# Altium PCB PCB1.PcbDoc
Units mil, origin at the board's own origin, x right, y up, seen from the top; angles counter-clockwise.
Board outline 6000 x 4000 mil, 2 copper layers (Top Layer, Bottom Layer); 47 components, 45 nets, 185 pads, 35 vias.
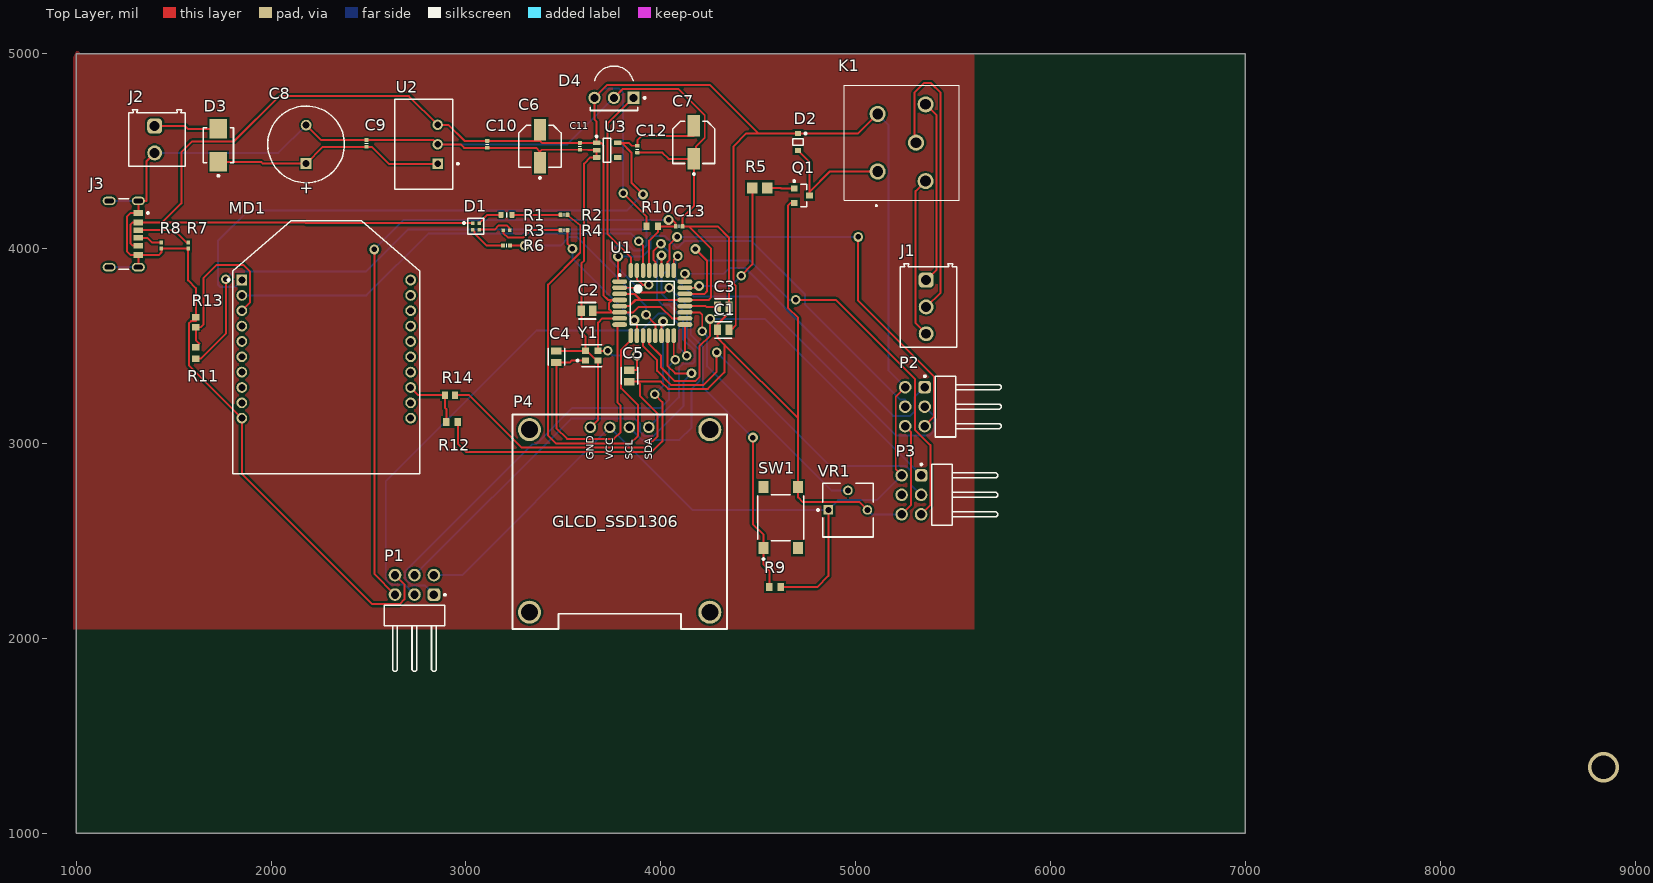
[diagram p0: Top Layer view]
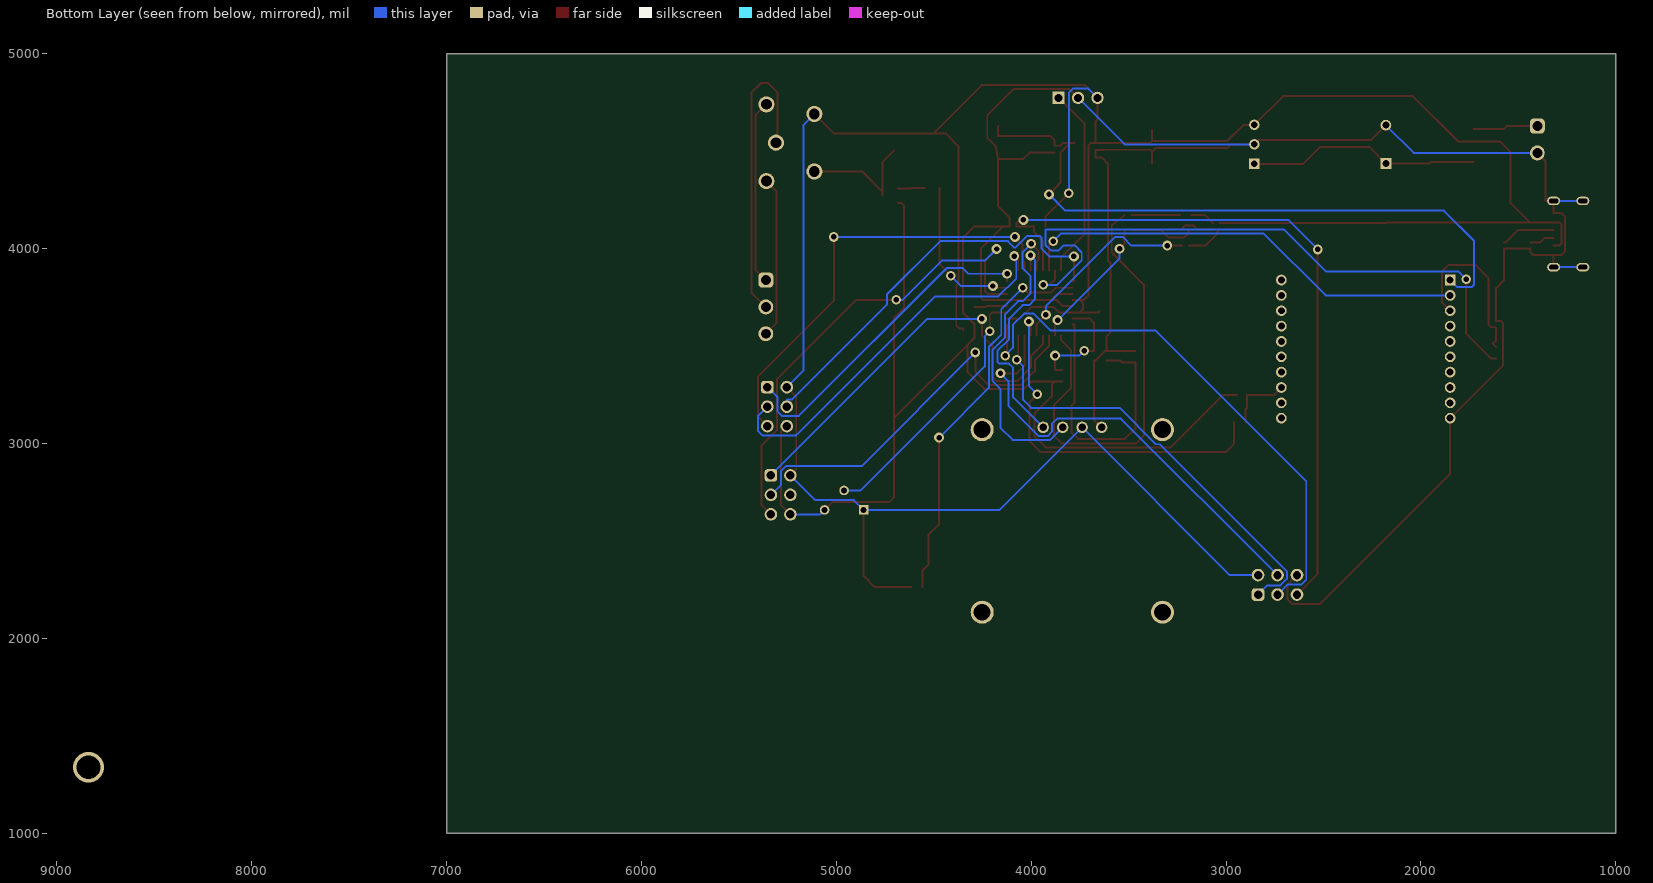
[diagram p1: Bottom Layer view, seen from below]
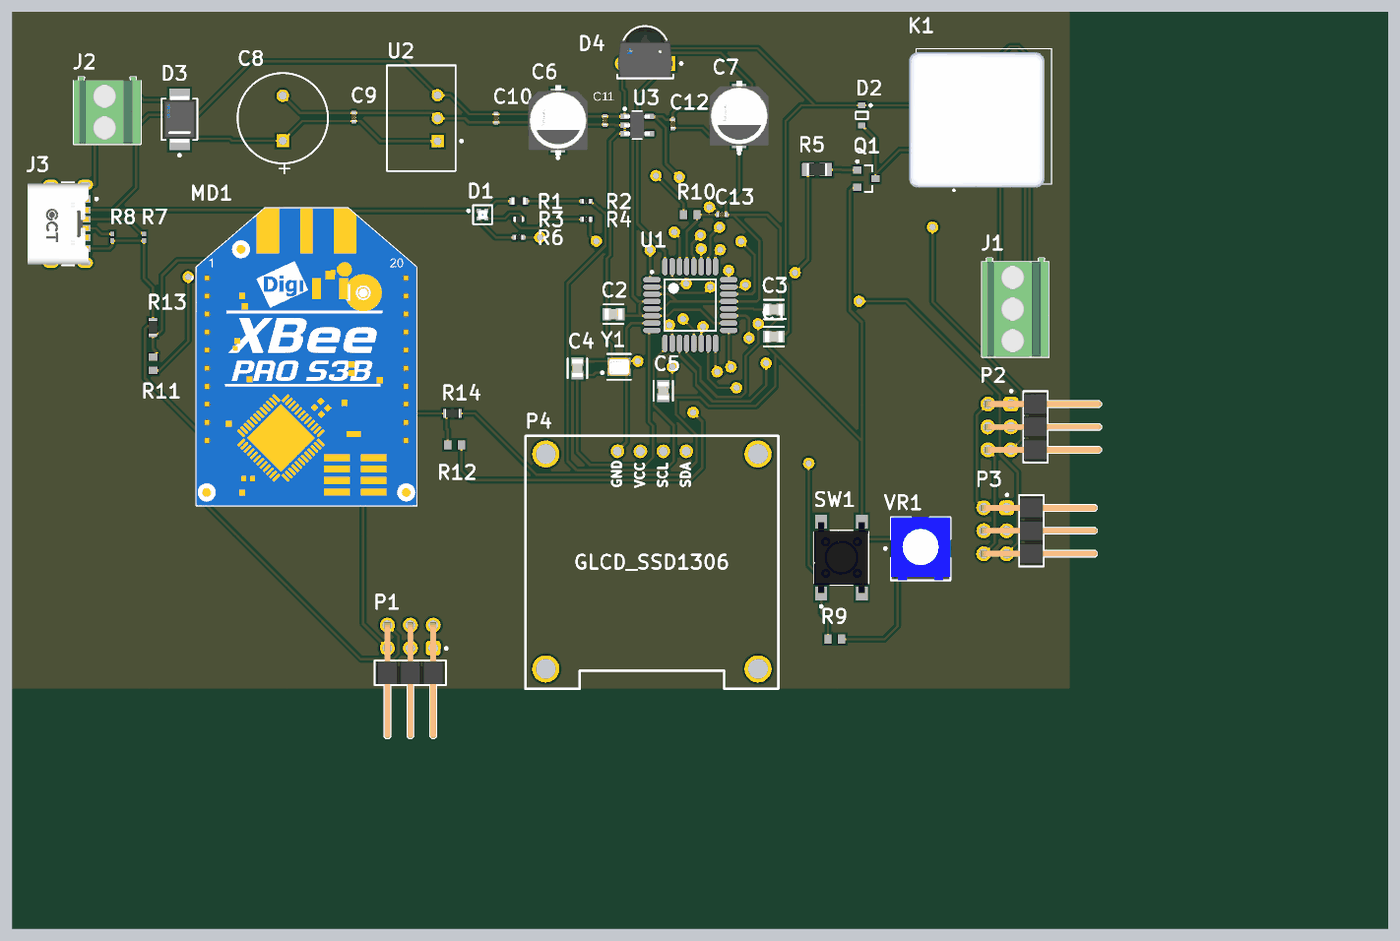
[diagram p2: 3D render of the assembled board from above, using the file's embedded part models]

## Layer stack, top to bottom
Top Solder: solder mask 0.4, Solder Resist, Dk 3.5
Top Layer: signal copper 1.4
Dielectric 1: dielectric 12.6, FR-4, Dk 4.8
Bottom Layer: signal copper 1.4
Bottom Solder: solder mask 0.4, Solder Resist, Dk 3.5

## Board outline
1000,1000 7000,1000 7000,5000 1000,5000

## Design rules (kind name [scope] priority, off if disabled: settings)
Clearance [All] p1: gap=10 ignorepadtopadclearanceinfootprint=FALSE
PolygonConnect [All] p1: connectstyle=Relief reliefconductorwidth=10 reliefentries=4 polygonreliefangle="90 Angle" airgapwidth=10
RoutingVias [All] p1: holewidth=28 width=50 viastyle="Through Hole" minholewidth=28 minwidth=50 maxholewidth=28 maxwidth=50
SolderMaskExpansion [All] p1: expansion=4 istentingtop=FALSE
SupplyNets "Schematic Supply Nets_3" [InNet('+24')] p1: voltage=0.000
SupplyNets "Schematic Supply Nets_2" [InNet('+3.3')] p2: voltage=0.000
SupplyNets "Schematic Supply Nets_1" [InNet('GND')] p3: voltage=0.000
SupplyNets "Schematic Supply Nets" [InNet('+5')] p4: voltage=0.000
Width [All] p1: maxlimit=10 minlimit=10 preferedwidth=10
30 further rules are at their usual default settings.

## Components (designator, comment, footprint, x,y, rotation, side; value= is the part's Value field where it differs from the comment)
C1 "100nF" FP-C0805C-DN-MFG 4320.87,3582.68 r180 top value="0.10 μF"
C2 "100nF" FP-C0805C-DN-MFG 3622.05,3681.1 r180 top value="0.10 μF"
C3 "100nF" FP-C0805C-DN-MFG 4320.87,3700.79 r0 top value="0.10 μF"
C4 "22pF" FP-C0805C-DN-MFG 3464.57,3444.88 r90 top value="22 pF"
C5 "22pF" FP-C0805C-DN-MFG 3838.58,3346.46 r270 top value="22 pF"
C6 "EEEFK1C470UR" FP-FKC-MFG 3380,4525 r90 top
C7 "EEEFK1C470UR" FP-FKC-MFG 4170,4545 r90 top
C8 "ECA-1HM221" CAPPR65-500-1250X1000X1350 2180,4535 r90 top value=220µF
C9 "Capacitor 100nF +/-20% 10V 0402" CAPC0402(1005)60_L 2490,4540 r270 top value=100nF
C10 "Capacitor 100nF +/-20% 10V 0402" CAPC0402(1005)60_L 3110,4535 r90 top value=100nF
C11 "Capacitor 100nF +/-20% 10V 0402" CAPC0402(1005)60_L 3585,4525 r90 top value=100nF
C12 "Capacitor 100nF +/-20% 10V 0402" CAPC0402(1005)60_L 3880,4510 r90 top value=100nF
C13 "Capacitor 100nF +/-20% 10V 0402" CAPC0402(1005)60_L 4094.49,4114.17 r180 top value=100nF
D1 "SML-LX0404SIUPGUSB" FP-SML-LX0404SIUPGUSB-MFG 3051.18,4114.17 r0 top
D2 "BAT54HT1G" ONSC-SOD-323-2-477-02_V 4704.72,4547.24 r270 top
D3 "B260-13-F" FP-SMB-MFG 1730,4530 r90 top value=200pF
D4 "TSOP34138" FP-6_550-5169_01-4-MFG 3759.84,4822.83 r90 top
J1 "691214110003" 691214110003 5374.02,3700.79 r270 top
J2 "691214110002" 691214110002 1415,4560 r270 top
J3 "USB4125-GF-A-0190" FP-USB4125-GF-A-0190-MFG 1200.79,4074.8 r270 top
K1 "PB114012" PB134005 5236.22,4527.56 r0 top
MD1 "XBP9B-DMUTB002" FP-XBP9B-DMUTB002-MFG 2283.46,3494.09 r0 top
P1 "61300621021" 61300621021 2736.22,2116.93 r0 top
P2 "61300621021" 61300621021 5461.81,3188.98 r90 top
P3 "61300621021" 61300621021 5443.7,2736.22 r90 top
P4 "Misc_25" GLCD_SSD1306 3789.37,2598.43 r0 top
Q1 "BC846BLT1G" ONSC-SOT-23-3-318-08_V 4724.41,4271.65 r0 top
R1 "Resistor 120R +/-5 % 0603 0.1 W" RESC0603(1608)_L 3208.66,4173.23 r0 top value=120
R2 "Resistor 10R  +/-1 % 0402 63 mW" RESC0402(1005)_L 3503.94,4173.23 r0 top value=10
R3 "ERJ-2GEJ221X" RESC1005X40X25LL05T05 3208.66,4094.49 r180 top
R4 "Resistor 10R  +/-1 % 0402 63 mW" RESC0402(1005)_L 3503.94,4094.49 r0 top value=10
R5 "Resistor 4k7 +/-1% 0805 125 mW" RESC2013X70X40ML20T20 4508.86,4311.02 r0 top value=4.7k
R6 "Resistor 100R +/-1 % 0402 63 mW" RESC0402(1005)_L 3208.66,4015.75 r0 top value=100
R7 "RC0402FR-075K11L" RESC1005X40X25LL05T10 1574.8,4015.75 r270 top
R8 "RC0402FR-075K11L" RESC1005X40X25LL05T10 1437.01,4015.75 r270 top
R9 "RC0603JR-074K7L" RESC1608X55X25ML10T15 4586.61,2263.78 r0 top
R10 "RC0603JR-074K7L" RESC1608X55X25ML10T15 3956.69,4114.17 r180 top
R11 "RC0603JR-074K7L" RESC1608X55X25ML10T15 1614.17,3464.57 r270 top
R12 "RC0603JR-074K7L" RESC1608X55X25ML10T15 2929.13,3110.24 r0 top
R13 "CRCW060310K0FKEA" RESC1609X50X30NL8T20 1614.17,3622.05 r270 top
R14 "CRCW060310K0FKEA" RESC1609X50X30NL8T20 2919.29,3248.03 r180 top
SW1 "PTS645SM43SMTR92LFS" FP-PTS645SM43SMTR92LFS-MFG 4616.14,2619.09 r90 top
U1 "ATmega328P-AU" 32A_M 3956.69,3720.47 r0 top
U2 "TSR 1-2450" TRACO-SIP-3_V 2855,4535 r90 top
U3 "TPS76333DBVR" DBV0005A_N 3725,4505 r0 top
VR1 "3362P-1-103LF" BOUR-3362P 4960.63,2657.48 r0 top
Y1 "ABM10-16.000MHZ-E20-T" FP-ABM10-MFG 3646.02,3450.94 r0 top

## Footprints (in the part's own frame and the unit in brackets; to place one, negate y for a bottom-side part, rotate by r counter-clockwise, add the part's x,y. Pads: shape width x height; smd on the part's side, far side on the other; paste and mask are expansions set on the pad)
32A_M [mm] "Thin QFP, 32-Leads, Body 7x7mm, Pitch 0.8mm, IPC Low Density"
  oval 1.95x0.6 smd: 1(-4.25,2.8) 2(-4.25,2) 3(-4.25,1.2) 4(-4.25,0.4) 5(-4.25,-0.4) 6(-4.25,-1.2) 7(-4.25,-2) 8(-4.25,-2.8) 17(4.25,-2.8) 18(4.25,-2) 19(4.25,-1.2) 20(4.25,-0.4) 21(4.25,0.4) 22(4.25,1.2) 23(4.25,2) 24(4.25,2.8)
  oval 0.6x1.95 smd: 9(-2.8,-4.25) 10(-2,-4.25) 11(-1.2,-4.25) 12(-0.4,-4.25) 13(0.4,-4.25) 14(1.2,-4.25) 15(2,-4.25) 16(2.8,-4.25) 25(2.8,4.25) 26(2,4.25) 27(1.2,4.25) 28(0.4,4.25) 29(-0.4,4.25) 30(-1.2,4.25) 31(-2,4.25) 32(-2.8,4.25)
  silkscreen extent -4.37,-2.85 2.85,3.77, body extent -3.5,-3.5 3.5,3.5, height 1.2
61300621021 [mm] "Pin Header, pitch 2.54 mm, THT, Angled, dual row, 6p"
  rrect50% 1.65x1.65 hole 1.1: 1(2.54,2.73)
  round 1.65 hole 1.1: 2(2.54,5.27) 3(0,2.73) 4(0,5.27) 5(-2.54,2.73) 6(-2.54,5.27)
  silkscreen extent -3.96,-7.27 4.1,2.82, body extent -3.81,-7.27 3.81,5.63, height 5.12
691214110002 [mm] "3.50 mm Horizontal Entry Modular, 2p"
  rrect50% 1.95x1.95 hole 1.3: 1(-1.75,-0.3)
  round 1.95 hole 1.3: 2(1.75,-0.3)
  silkscreen extent -3.9,-3.7 3.5,3.7, body extent -3.95,-3.7 3.5,3.7, height 8.55
691214110003 [mm] "3.50 mm Horizontal Entry Modular, 3p"
  rrect50% 1.95x1.95 hole 1.3: 1(-3.5,-0.3)
  round 1.95 hole 1.3: 2(0,-0.3) 3(3.5,-0.3)
  silkscreen extent -5.65,-3.7 5.25,3.7, body extent -5.7,-3.7 5.25,3.7, height 8.55
BOUR-3362P [mm] "THD, 3-Leads, Body 6.6x6.99mm, Pitch 2.54mm"
  rect 1.25x1.25 hole 0.75: 1(-2.54,0.035)
  round 1.25 hole 0.75: 2(0,2.575) 3(2.54,0.035)
  silkscreen extent -4.02,-3.49 3.3,3.49, body extent -3.3,-3.49 3.3,3.5, height 4.5
CAPC0402(1005)60_L [mm] "Chip Capacitor, Body 1.0x0.5mm, Height 0.6mm, IPC High Density"
  rrect25% 0.5x0.55 smd: 1(-0.45,0) 2(0.45,0)
  silkscreen extent 0,-0.2 0,0.2, body extent -0.5,-0.25 0.5,0.25, height 0.6
CAPPR65-500-1250X1000X1350 [mm] "THD, 2-Leads, Dia 10mm, Body Length 12.5mm"
  rect 1.4x1.4 hole 0.9: 1(-2.5,0)
  round 1.4 hole 0.9: 2(2.5,0)
  silkscreen extent -5,-5 5,5, body extent -5,-5 4.95,5, height 13.5
DBV0005A_N [mm] "SOT23, 5-Leads, Body 3.05x1.75mm, Pitch 0.95mm, IPC Medium Density"
  rrect17% 1x0.6 smd: 1(-1.375,0.95) 2(-1.375,0) 3(-1.375,-0.95) 4(1.375,-0.95) 5(1.375,0.95)
  silkscreen extent -1.5,-1.55 0.5,1.92, body extent -1.42,-1.46 1.42,1.46, height 1.08
FP-6_550-5169_01-4-MFG [mm]
  rect 1.6x1.6 hole 1.05 paste-2539.97 mask+0: 1(-1.25,-2.54)
  round 1.6 hole 1.05 paste-2539.97 mask+0: 2(-1.25,0) 3(-1.25,2.54)
  silkscreen extent -2.9,-4.13 2.9,3.1, body extent -3,-3.44 3,3.44, height 0.25
FP-ABM10-MFG [mm]
  rect 0.9x0.8 smd paste+0 mask+0: 1(-0.825,-0.625) 2(0.825,-0.625) 3(0.825,0.625) 4(-0.825,0.625)
  silkscreen extent -1.97,-1.43 1.3,1.43, body extent -1.42,-1.15 1.4,1.15, height 0.25
FP-C0805C-DN-MFG [mm]
  rect 0.95x1.35 smd paste+0 mask+0: 1(-0.75,0) 2(0.75,0)
  silkscreen extent -1.1,-1.07 1.1,1.08, body extent -1.4,-0.85 1.4,0.85, height 0.25
FP-FKC-MFG [mm]
  rect 2.8x1.6 smd paste+0 mask+0: 1(-2.15,0) 2(2.15,0)
  silkscreen extent -4.25,-2.75 2.76,2.75, body extent -3.8,-3 3.8,3, height 0.25
FP-PTS645SM43SMTR92LFS-MFG [mm]
  rect 1.55x1.3 smd paste+0 mask+0: 1(-3.975,2.25) 2(3.975,2.25) 3(-3.975,-2.25) 4(3.975,-2.25)
  silkscreen extent -5.52,-3 3,3, body extent -4.85,-3.1 4.85,3.1, height 0.25
FP-SMB-MFG [mm]
  rect 2.5x2.3 smd paste+0 mask+0: 1(-2.15,0) 2(2.15,0)
  silkscreen extent -4.1,-1.97 2.28,1.97, body extent -3.5,-2.07 3.5,2.07, height 0.25
FP-SML-LX0404SIUPGUSB-MFG [mm]
  rect 0.45x0.45 smd paste+0 mask+0: 1(-0.425,0.425) 2(0.425,0.425) 3(0.425,-0.425) 4(-0.425,-0.425)
  silkscreen extent -1.67,-1.05 1.05,1.05, body extent -0.85,-0.85 0.85,0.85, height 0.25
FP-USB4125-GF-A-0190-MFG [mm]
  rrect100% 1.1x1.7 hole 1.2 slot 0.6 at 0 deg paste-2539.97 mask+0: 1(-4.32,3) 2(4.32,3) 3(-4.32,-0.8) 4(4.32,-0.8)
  rect 0.7x1.2 smd paste+0 mask+0: A5(-0.5,3) B5(0.5,3)
  rect 0.76x1.2 smd paste+0 mask+0: A9(1.52,3) B9(-1.52,3)
  rect 0.8x1.2 smd paste+0 mask+0: A12(2.75,3) B12(-2.75,3)
  silkscreen extent -4.59,0.43 4.59,4.38, body extent -4.97,-3.57 4.97,3.95, height 0.25
FP-XBP9B-DMUTB002-MFG [mm]
  rect 1.4x1.4 hole 0.9 paste-2539.97 mask+0: 1(-11,8.75)
  round 1.4 hole 0.9 paste-2539.97 mask+0: 2(-11,6.75) 3(-11,4.75) 4(-11,2.75) 5(-11,0.75) 6(-11,-1.25) 7(-11,-3.25) 8(-11,-5.25) 9(-11,-7.25) 10(-11,-9.25) 11(11,-9.25) 12(11,-7.25) 13(11,-5.25) 14(11,-3.25) 15(11,-1.25) 16(11,0.75) 17(11,2.75) 18(11,4.75) 19(11,6.75) 20(11,8.75)
  silkscreen extent -12.86,-16.47 12.19,16.47, body extent -12.29,-16.57 12.29,16.57, height 0.25
GLCD_SSD1306 [mm]
  round 3 hole 2.2: 0(-11.75,-11.8) 0(-11.75,12) 0(11.75,-11.8) 0(11.75,12)
  round 1.5 hole 1: 1(-3.82,12.3) 2(-1.28,12.3) 3(1.26,12.3) 4(3.8,12.3)
  silkscreen extent -14,-14 14,14, body extent -14,-14 14,14, height 6
ONSC-SOD-323-2-477-02_V [mm] "SOD, 2-Leads, Body 1.7x1.25mm"
  rect 0.63x0.83 smd: 1(-1.115,0) 2(1.115,0)
  silkscreen extent -1.24,-0.67 0.4,1.09, body extent -0.85,-0.63 0.85,0.63, height 1.06
ONSC-SOT-23-3-318-08_V [mm] "SOT23, 3-Leads, Body 2.92x1.3mm, Pitch 0.95mm"
  rect 0.9x0.8 smd: 1(-1,0.95) 2(-1,-0.95) 3(1,0)
  silkscreen extent -1.12,-1.46 0.65,2.02, body extent -0.65,-1.46 0.65,1.46, height 1.11
PB134005 [mm]
  round 2.1 hole 1.4: 1(-3.125,-3.35) 2(3.125,-4.6) 3(1.875,0.4) 4(3.125,5.4) 5(-3.125,4.15)
  silkscreen extent -7.5,-7.9 7.5,7.9, body extent -8.28,-7.5 6.72,7.5, height 19.7
RESC0402(1005)_L [mm] "Chip Resistor, Body 1.0x0.5mm, IPC High Density"
  rrect25% 0.5x0.55 smd: 1(-0.45,0) 2(0.45,0)
  silkscreen extent 0,-0.2 0,0.2, body extent -0.5,-0.25 0.5,0.25, height 0.3
RESC0603(1608)_L [mm] "Chip Resistor, Body 1.6x0.8mm, IPC High Density"
  rrect25% 0.66x0.76 smd: 1(-0.7,0) 2(0.7,0)
  silkscreen extent 0,-0.3 0,0.3, body extent -0.8,-0.4 0.8,0.4, height 0.45
RESC1005X40X25LL05T05 [mm] "Chip Resistor, 2-Leads, Body 1.05x0.55mm, IPC High Density"
  rect 0.45x0.45 smd: 1(-0.4,0) 2(0.4,0)
  body extent -0.53,-0.28 0.53,0.28, height 0.4
RESC1005X40X25LL05T10 [mm] "Chip Resistor, 2-Leads, Body 1.00x0.50mm, IPC High Density"
  rect 0.5x0.45 smd: 1(-0.375,0) 2(0.375,0)
  body extent -0.53,-0.27 0.53,0.28, height 0.4
RESC1608X55X25ML10T15 [mm] "Chip Resistor, 2-Leads, Body 1.60x0.80mm, IPC Low Density"
  rect 0.8x1 smd: 1(-0.75,0) 2(0.75,0)
  body extent -0.85,-0.45 0.85,0.45, height 0.55
RESC1609X50X30NL8T20 [mm] "Chip Resistor, 2-Leads, Body 1.65x0.95mm, IPC Medium Density"
  rect 0.8x0.95 smd: 1(-0.65,0) 2(0.65,0)
  body extent -0.82,-0.48 0.82,0.48, height 0.5
RESC2013X70X40ML20T20 [mm] "Chip Resistor, 2-Leads, Body 2.2x1.35mm, IPC Low Density"
  rect 1.35x1.45 smd: 1(-0.975,0) 2(0.975,0)
  body extent -1.1,-0.67 1.1,0.67, height 0.7
TRACO-SIP-3_V [mm] "SIP, 3-Leads, Body 11.7x7.6mm, Pitch 2.54mm"
  rect 1.35x1.35 hole 0.85 paste-2539.97: 1(-2.54,0)
  round 1.35 hole 0.85 paste-2539.97: 2(0,0) 3(2.54,0)
  silkscreen extent -5.84,-2.77 5.86,5.6, body extent -5.84,-2 5.86,5.6, height 10.2

## Part data
C1 C2 C3: library part CMP-2007-00279-2, "CAP CER 0.1UF 50V X7R 0805", Capacitance="0.10 μF", Manufacturer=KEMET, Manufacturer Part Number=C0805C104K5RACTU, Package=C0805C-DN, Temperature="-55°C to +125°C", Temperature Characteristic=X7R, Temperature Coefficient=30ppm/°C, Temperature Range High=+125°C, Temperature Range Low=-55°C, Tolerance=0.1, Voltage Rating="50 V", Automotive=No, Category=Cap, ComponentLink2Description=Datasheet, ComponentLink2URL=https://content.kemet.com/datasheets/KEM_C1003_C0G_SMD.pdf, Device Class L1="Passive Components", Device Class L2=Capacitors, Device Class L3="Ceramic Capacitors", Digikey Description="CAP CER 0.1UF 50V X7R 0805", Height=0.88mm, Ipc Land Pattern Name=CAPC200125X78, Lead Free=Yes, Material=Ceramic, Mouser Description="Cap Ceramic 0.1uF 50V X7R 10% SMD 2.0 x 1.2 mm 125 C Paper T/R", Octopart=https://octopart.com/c0805c104k5ractu-kemet-143926, RoHS=TRUE
C4 C5: library part CMP-2007-00048-2, "Capacitor; Ceramic; Cap; 22.0pF; Tol 5%; SMT; Vol-Rtg 50V; C0G; Tape and Reel", Capacitance="22 pF", Manufacturer=KEMET, Manufacturer Part Number=C0805C220J5GACTU, Package=C0805C-DN, Temperature="-55°C to +125°C", Temperature Characteristic=C0G, Temperature Coefficient=30ppm/°C, Temperature Range High=+125°C, Temperature Range Low=-55°C, Tolerance=0.05, Voltage Rating="50 V", Automotive=No, Category=Cap, ComponentLink2Description=Datasheet, ComponentLink2URL=https://content.kemet.com/datasheets/KEM_C1003_C0G_SMD.pdf, Device Class L1="Passive Components", Device Class L2=Capacitors, Device Class L3="Ceramic Capacitors", Digikey Description="Capacitor; Ceramic; Cap; 22.0pF; Tol 5%; SMT; Vol-Rtg 50V; C0G; Tape and Reel", Height=0.88mm, Ipc Land Pattern Name=CAPC200125X78, Lead Free=Yes, Material=Ceramic, Mouser Description="Multilayer Ceramic Capacitors MLCC - SMD/SMT 50volts 22pF C0G 5%", Octopart=https://octopart.com/c0805c220j5gactu-kemet-145470, RoHS=TRUE
C6 C7: library part CMP-05427-002132-1, "CAP ALUM 47UF 20% 16V SMD", Capacitance=47uF, Case/Package=Radial, Dielectric Material=Aluminium, ESR (Equivalent Series Resistance)=700mR, Leakage Current=3uA, Max Operating Temperature=105°C, Min Operating Temperature=-55°C, Package Quantity=1000, Ratings=AEC-Q200, Ripple Current=160mA, Tolerance=20%, Voltage=10V, Voltage Rating=16V, Construction=Cylindrical, Contact Plating=Tin, Diameter=5mm, Height=5.8mm, Height - Seated (Max)=0.228inch, Impedance=700mR, Lead Free="Lead Free", Length=5.8mm, Life (Hours)=2000Hour, Material=Aluminium, Mount="Surface Mount", Number of Pins=2, Packaging="Tape and Reel", Radiation Hardening=No, Reach SVHC Compliant=Yes, Ripple Current (AC)=160mA, RoHS Compliant=Yes, Series=FK, Termination=SMD/SMT, Voltage Rating (DC)=16V, Width=6.5mm
C8: library part CMP-001-00028-7, "Aluminum Electrolytic Capacitor, 220 uF, +/- 20%, 50 V, -40 to 85 degC, 2-Pin THD, RoHS, Bulk", Capacitor Type=Electrolytic, Case/Package=Radial, Manufacturer=Panasonic, Max Operating Temperature=85°C, Min Operating Temperature=-40°C, Package Description="2-Pin Radial Lead, Dia 10 mm, Body Length 12.5 mm", Package Quantity=200, Package Reference=CAPPR65-500-1250X1000X1350, Ripple Current=400mA, Tolerance=20%, Voltage Rating=50V, Datasheet URL=http://industrial.panasonic.com/cdbs/www-data/pdf/RDF0000/DMF0000COL68.pdf, Datasheet Version=Mar-16, Diameter=10mm, Lead Pitch=5mm, Manufacturer URL=http://www.panasonic.com/, Mounting Technology=TH, Packaging=Bulk, Pins=2, Ripple Current (AC)=400mA, RoHS Compliant=True
C9 C10 C11 C12 C13: library part CMP-001-00061-3, "Chip Capacitor, 100nF +/-20%, 10V, 0402, Thickness 0.6 mm", Case/Package=0402, Max Operating Temperature=85°C, Min Operating Temperature=-55°C, Tolerance=20%, Voltage Rating=10V, Mounting Technology=SMT, Pins=2
D1: library part CMP-2000-07119-2, "LED RGB CLEAR SMD", Case Code (Imperial)=0404, Case Code (Metric)=1010, Color=Blue, Forward Current=2mA, Forward Voltage=2.73V, Lens Color=Colorless, Max Operating Temperature=85°C, Min Operating Temperature=-40°C, Package Quantity=2000, Power Rating=30mW, Case/Package=0404, Height=0.3mm, Lead Free="Lead Free", Length=1mm, Lens Style=Square, Lens Transparency=Clear, Luminous Intensity=20mcd, Mount="Surface Mount", Number of LEDs=3, Packaging="Tape and Reel", REACH SVHC="No SVHC", Test Current=2mA, Viewing Angle=120°, Wavelength=465nm, Width=1mm
D2: library part CMP-1055-00462-1, "Schottky Barrier Diode, 2-Pin SOD-323, Pb-Free, Tape and Reel", Manufacturer="On Semiconductor", ComponentLink1Description="Manufacturer URL", ComponentLink1URL=http://www.onsemi.com/, ComponentLink2Description=Datasheet, ComponentLink2URL=http://www.onsemi.cn/pub_link/Collateral/BAT54HT1-D.PDF, ComponentLink3Description="Package Specification", ComponentLink3URL=http://www.onsemi.com/pub_link/Collateral/477-02.PDF.1, Configuration=Single, DatasheetVersion="Rev. 6", IFSM Max (A)=0.6, Mounting Technology="Surface Mount", PackageDescription="2-Pin SOD, Body 1.7 x 1.25 mm", PackageReference=SOD-323-2-477-02, PackageVersion="Rev. H, 03/2007", Packing="Tape and Reel", PartNumber=BAT54HT1G, RoHS=TRUE, trr Max (ns)=5
D3: library part CMP-12790-000014-1, "DIODE SCHOTTKY 60V 2A SMB", Capacitance=200pF, Forward Current=2A, Manufacturer="Diodes Inc.", Max Junction Temp=+150°C, Max Repetitive Reverse Voltage=60V, Max Surge Forward Current=50A, Package=SMB, Peak Reverse Current=0.5mA, Temperature="-65°C to +150°C", Temperature Range Low=-65°C, Automotive=No, Category=Diode, ComponentLink2Description=Datasheet, ComponentLink2URL=https://www.diodes.com/assets/Datasheets/ds13004.pdf, Device Class L1="Discrete Semiconductors", Device Class L2=Diodes, Device Class L3="Schottky Diodes", Digikey Description="DIODE SCHOTTKY 60V 2A SMB", Footprint Url=https://www.diodes.com/assets/Package-Files/SMB.pdf, Height=2.5mm, Lead Free=Yes, Manufacturer Part Number=B260-13-F, Mouser Description="Schottky Diodes & Rectifiers 60V 2A", Octopart=https://octopart.com/b260-13-f-diodes+inc.-325789, Reverse Voltage=60V, RoHS=TRUE, Standoff Height=0.05mm, Temperature Range High=+150°C
D4: library part CMP-02532-000001-1, "SENSOR REMOTE REC 38.0KHZ 45M", Ambient Temperature Range High=+85°C, Ambient Temperature Range Low=-25°C, Manufacturer=Vishay, Max Junction Temp=+100°C, Max Supply Voltage=5.5V, Min Supply Voltage=2.5V, Operating Supply Current=3mA, Output Current=5mA, Package=6.550-5169.01-4, Temperature="-25°C to +85°C", Automotive=No, Category=Diode, ComponentLink2Description=Datasheet, ComponentLink2URL=http://www.vishay.com/docs/82490/tsop321.pdf, Device Class L1=Sensors, Device Class L2="Optical Sensors", Device Class L3="Photoelectric Sensors", Digikey Description="SENSOR REMOTE REC 38.0KHZ 45M", Height=10.85mm, Lead Free=Yes, Manufacturer Part Number=TSOP34138, Mouser Description="38 kHz 45 m 2.5-5.5 V Through Hole IR Receiver Module for Remote Control System", Octopart=https://octopart.com/tsop34138-vishay-55433998, RoHS=TRUE, Sensing Distance=30m, Sensor Output=Other, Standoff Height=2.5mm, Temperature Range High=+85°C, Temperature Range Low=-25°C
J1: library part CMP-1502-02466-2, Color="Blue, Green", Current=10A, Max Operating Temperature=105°C, Min Operating Temperature=-40°C, Voltage=300V, Contact Material=Brass, Contact Plating="Brass, Tin", Current Rating=10A, Height=12.2mm, Housing Material=Nylon, Lead Pitch=3.5mm, Length=7.4mm, Mount="Through Hole", NexarPartId=18818289, Number of Contacts=3, Number of Levels=1, Number of Pins=3, Number of Positions Per Level=3, Packaging=Box, Pitch=3.5052mm, Plating="Brass, Steel", REACH SVHC=Unknown, RoHS=Compliant, Stripping Length=-6mm, Termination=Screw, Voltage Rating=300V, Width=10.9mm, Wire Gauge (Max)=24AWG, Wire Gauge (Min)=16AWG, Wire/Cable Gauge=24AWG
J2: library part CMP-1502-02464-2, Color="Blue, Green", Current=10A, Max Operating Temperature=105°C, Min Operating Temperature=-40°C, Voltage=300V, Contact Material=Brass, Contact Plating="Brass, Tin", Current Rating=10A, Height=8.7mm, Housing Material=Nylon, Lead Pitch=3.5mm, Length=7.4mm, Mount="Through Hole", NexarPartId=18818288, Number of Contacts=2, Number of Levels=1, Number of Pins=2, Number of Positions Per Level=2, Number of Rows=1, Packaging=Box, Pitch=3.5052mm, Plating="Brass, Steel", REACH SVHC=Unknown, RoHS=Compliant, Stripping Length=-6mm, Termination=Screw, Voltage Rating=300V, Width=7.9mm, Wire Gauge (Max)=24AWG, Wire Gauge (Min)=16AWG, Wire/Cable Gauge=24AWG
J3: library part CMP-245163-000004-1, "CONN RCPT TYPE C 6P SMD RA"
K1: "Relay or Contactor", Manufacturer_Name="TE Connectivity", Mouser Part Number=655-PB114012, Arrow Part Number=PB114012, Arrow Price/Stock=https://www.arrow.com/en/products/pb114012/te-connectivity?region=nac, Datasheet Link=https://www.te.com/commerce/DocumentDelivery/DDEController?Action=srchrtrv&DocNm=PB&DocType=Data%20Sheet&DocLang=English&PartCntxt=8-1415029-1&DocFormat=pdf, Height=20mm, Manufacturer_Part_Number=PB114012, Mouser Price/Stock=https://www.mouser.co.uk/ProductDetail/TE-Connectivity-PB/PB114012?qs=h4sDRd%2FXttgmnfmiBw0NHA%3D%3D
MD1: library part CMP-84319-000004-1, "RX TXRX MOD ISM < 1GHZ U.FL TH", Case/Package=Module, Current - Receiving=29mA, Current - Transmitting=215mA, Frequency=900MHz, Max Frequency=928MHz, Max Operating Temperature=85°C, Max Supply Voltage=3.6V, Min Frequency=902MHz, Min Operating Temperature=-40°C, Min Supply Voltage=2.4V, Output Power (dBm)=24dBm, Package Quantity=1, Data Rate=200Kbps, Interface=SPI, Memory Size=2KB, Number of Pins=20, Packaging=Bulk, Radiation Hardening=No, RAM Size=2KB, Sensitivity=-101dBm, Series=XBee-Pro™
P1 P2 P3: library part CMP-1502-01071-4, Color=Black, Contact Resistance=20mΩ, Current Rating=3A, Max Operating Temperature=105°C, Min Operating Temperature=-40°C, Operating Supply Voltage=250V, Connector Type="Male Pin", Contact Material=Copper, Contact Mating Length=5.9944mm, Contact Plating=Gold, Gender=Male, Height=5.23mm, Lead Pitch=2.54mm, Mount="Through Hole", NexarPartId=32855528, Number of Contacts=6, Number of Pins=6, Number of Positions=6, Number of Rows=2, Packaging=Bulk, Pitch=2.54mm, REACH SVHC=Unknown, RoHS=Compliant, Row Spacing=2.54mm, Termination=Solder, Voltage Rating=250V
P4: library part CMP-021-000017-1, Component Type=Standard, Design Item ID=Misc_25, mounting=THT, Pin Count=4, QR=0, RS_number="120 622", Source=Miscellaneous$.SchLib, UID=Misc_25
Q1: library part CMP-1048-00779-1, "General Purpose Transistor, NPN Silicon, 3-Pin SOT-23, Pb-Free, Tape and Reel", Manufacturer="On Semiconductor", ComponentLink1Description="Manufacturer URL", ComponentLink1URL=http://www.onsemi.com/, ComponentLink2Description=Datasheet, ComponentLink2URL=http://www.onsemi.cn/pub_link/Collateral/BC846ALT1-D.PDF, ComponentLink3Description="Package Specification", ComponentLink3URL=http://www.onsemi.cn/pub_link/Collateral/318-08.PDF, DatasheetVersion="Rev. 11", fT Min (MHz)=100, IC Continuous (A)=0.1, Mounting Technology="Surface Mount", PackageDescription="3-Pin Small Outline Transistor, Body 2.92 x 1.3 mm, Pitch 0.95 mm", PackageReference=SOT-23-3-318-08, PackageVersion="Rev. AP, 11/2009", Packing="Tape and Reel", PartNumber=BC846BLT1G, Polarity=NPN, RoHS=TRUE
R1: library part CMP-009-00176-3, "Chip Resistor, 120 Ohms, +/-5 %, 0.1 W, -55 to 155 degC, 0603", Case/Package=0603, Max Operating Temperature=155°C, Min Operating Temperature=-55°C, Power=100mW, Tolerance=5%, Pins=2
R2 R4: library part CMP-009-00152-3, "Chip Resistor, 10 Ohms, +/-1 %, 63 mW, -55 to 155 degC, 0402", Case/Package=0402, Max Operating Temperature=155°C, Min Operating Temperature=-55°C, Power=63mW, Tolerance=1%, Pins=2
R3: library part CMP-2002-00487-3, "Chip Resistor, 220 Ohm, +/- 5%, 100 mW, -55 to 155 degC, 0402 (1005 Metric), RoHS, Tape and Reel", Case Code (Imperial)=0402, Case Code (Metric)=1005, Manufacturer="Basic Passives", Max Operating Temperature="155 degC", Min Operating Temperature="-55 degC", Package Quantity=10000, Power Rating="100 mW", Resistance="220 Ohm", Tolerance=5%, Voltage Rating="50 V", Case\/Package=0402, ComponentLink1Description="Manufacturer URL", ComponentLink1URL=http://www.panasonic.com/, ComponentLink2Description=Datasheet, ComponentLink2URL=http://industrial.panasonic.com/cdbs/www-data/pdf/RDA0000/AOA0000C84.pdf, DatasheetVersion=04/2015, Height="0.35 mm", Length="1 mm", Mount="Surface Mount", Mounting Technology="Surface Mount", PackageDescription="2-Pin Surface Mount Device, Body 1 x 0.5 mm", PackageReference=0402, Packaging="Tape and Reel", PartNumber=ERJ-2GEJ221X, Pins=2, Radiation Hardening=No, REACH SVHC=Unknown, RoHSCompliant=true, Width="0.5 mm"
R5: library part CMP-009-00032-5, "Chip Resistor, 4.7 KOhm, +/- 1%, 0.125 W, -55 to 155 degC, 0805 (2012 Metric)", Case/Package=0805, Max Operating Temperature=155°C, Min Operating Temperature=-55°C, Power=125mW, Tolerance=1%, Voltage Rating=150V, Mounting Technology=SM, Pins=2, RoHS Compliant=True
R6: library part CMP-009-00167-3, "Chip Resistor, 100 Ohms, +/-1 %, 63 mW, -55 to 155 degC, 0402", Case/Package=0402, Max Operating Temperature=155°C, Min Operating Temperature=-55°C, Power=63mW, Tolerance=1%, Pins=2
R7 R8: library part CMP-2002-07752-1, Manufacturer="Yageo / Phycomp", Part Number=RC0402FR-075K11L
R9 R10 R11 R12: library part CMP-2000-05024-1, "Chip Resistor, 4.7 KOhm, +/- 5%, 100 mW, -55 to 155 degC, 0603 (1608 Metric), RoHS, Tape and Reel", Case Code - in=0603, Case Code - mm=1608, Manufacturer=Yageo, Operating Temperature Range=-55Cto+155C, Package Description="2-Pin Surface Mount Device, Body 1.6 x 0.8 mm", Package Reference=603, Power Rating=100mW, Resistance=4.7kOhms, Temperature Coefficient=100PPM/C, Tolerance=5%, Voltage Rating=50V, Datasheet URL=http://www.yageo.com/documents/recent/PYu-RC_Group_51_RoHS_L_04.pdf, Datasheet Version="Rev. 4, 02/2016", Manufacturer URL=http://www.yageo.com/, Packaging=Reel, Product=ThickFilmResistorsGeneralPurpose, Series=RC, Termination Style=SMD/SMT
R13 R14: library part CMP-1666-00005-4, "Chip Resistor, 10 KOhm, +/- 1%, 100 mW, -55 to 155 degC, 0603 (1608 Metric), RoHS, Tape and Reel", Manufacturer="Vishay Semiconductor", Max Operating Temperature="155 degC", Min Operating Temperature="-55 degC", Package Quantity=5000, Voltage Rating="75 V", ComponentLink1Description="Manufacturer URL", ComponentLink1URL=http://www.vishay.com/, ComponentLink2Description=Datasheet, ComponentLink2URL=https://datasheet.ciiva.com/11809/0900766b80d98afc-11809037.pdf, DatasheetVersion=06/2012, Height="0.45 mm", Length="1.55 mm", Mounting Technology="Surface Mount", PackageDescription="2-Pin Surface Mount Device, Body 1.575 x 0.85 mm", PackageReference=0603, Packaging="Tape and Reel", REACH SVHC=Unknown, RoHSCompliant=true
SW1: library part CMP-2000-05160-2, "SWITCH TACTILE SPST-NO 0.05A 12V", Case/Package=SMD/SMT, Color=Black, Contact Resistance=100mR, Current Rating=50mA, Max Operating Temperature=60°C, Max Voltage Rating (DC)=12V, Min Operating Temperature=-20°C, Operating Force=160gf, Package Quantity=1, Actuator Length=0.85mm, Actuator Material=Nylon, Actuator Type=Standard, Contact Material=Silver, Contact Plating=Silver, Depth=9mm, Illumination Type=Non-Illuminated, Lead Free="Lead Free", Length=6mm, Max Current Rating=50mA, Mechanical Life=100000Cycles, Mount="Surface Mount", Orientation=Straight, Packaging="Tape and Reel", REACH SVHC="No SVHC", Switch Function=Off-Mom, Termination="Gull Wing", Throw Configuration=SPST, Voltage Rating (DC)=12V
U1: library part CMP-0095-00269-2, "8-bit AVR Microcontroller, 32KB Flash, 1KB EEPROM, 2KB SRAM, 32-pin TQFP, Industrial Grade (-40°C to 85°C)", Code_JEDEC=MS-026-ABA, ComponentLink1Description="Manufacturer URL", ComponentLink1URL=http://www.atmel.com/, ComponentLink2Description="ATmega48A/48PA/88A/88PA/168A/168PA/328/328P Datasheet", ComponentLink2URL=http://www.atmel.com/dyn/resources/prod_documents/doc8271.pdf, ComponentLink3Description="ATmega48A/48PA/88A/88PA/168A/168PA/328/328P Summary", ComponentLink3URL=http://www.atmel.com/dyn/resources/prod_documents/8271S.pdf, DatasheetVersion="revD, May-2011", PackageDescription="32-Lead, 7x7x1.0 mm Body, 0.8mm Lead Pitch, Thin Profile Plastic Quad Flat Package (TQFP)", PackageReference=32A, PackageVersion="revC, Oct-2010", RevisionNote="DatasheetVersion & PackageVersion updated. URLs added."
U2: library part CMP-2000-05427-1, "DC/DC converter, 5 VDC, 1000 mA, -40 to 85 degC, 3-Pin SIP, RoHS", Input Voltage DC Max=36V, Input Voltage DC Min=6.5V, Manufacturer=Tracopower, Output Current Max=1A, Output Power Max=5W, Output Voltage Nom.=5V, Package Description="3-Pin Single In-line Package, Body 11.7 x 7.6 mm, Pitch 2.54 mm", Package Reference=SIP-3, Approvals & Standards=IEC,UL, Datasheet URL=https://datasheet.ciiva.com/6815/tsr1-6815641.pdf, Datasheet Version=Jan-15, DC / DC Converter Mounting=ThroughHole, DC / DC Converter Output Type=Fixed, DC / DC Converter Type=SIP, Depth=11.7mm, Height=10.2mm, Manufacturer URL=http://www.tracopower.com/home, No. of Outputs=1Output, Product Range=TSR-1Series, Width=7.6mm
U3: library part CMP-0394-00569-2, "Single Output LDO, 150 mA, Fixed 3.3 V Output, 2.7 to 10 V Input, with Low IQ, 5-pin SOT-23 (DBV), -40 to 125 degC, Green (RoHS & no Sb/Br)", Manufacturer="Texas Instruments", Accuracy(%)=3, Code_JEDEC=MO-178, ComponentLink1Description="Manufacturer URL", ComponentLink1URL=http://www.ti.com/, ComponentLink2Description=Datasheet, ComponentLink2URL=http://www.ti.com/general/docs/lit/getliterature.tsp?genericPartNumber=TPS76333&fileType=pdf, ComponentLink3Description="Package Specification", ComponentLink3URL=http://www.ti.com/litv/pdf/mpds018i, DatasheetVersion=SLVS181H, Eco-Plan="Green (RoHS & no Sb/Br)", Fixed Output Options(V)=3.3, Iout(Max)(A)=0.15, Iq(Typ)(mA)=0.08, Mounting Technology="Surface Mount", PackageDescription="5-Pin Plastic Small Outline, Body 1.60 Ãƒâ€” 2.90 mm, Pitch 0.95 mm", PackageReference=DBV0005A, PackageVersion=4073253-4/K, PartNumber=TPS76333DBVR, SubFamily="Single Channel LDO", Vdo(Typ)(mV)=300, Vin(Max)(V)=10, Vin(Min)(V)=2.7, Vout Adj(Max)(V)=3.3, Vout Adj(Min)(V)=3.3
VR1: library part CMP-009-00039-2, "Square Trimpot(R) Trimming Potentiometer, 10 KOhm, 300 V, -55 to 125 degC, 3-Pin THD, RoHS, Tube", Case/Package=3326P, Manufacturer=Bourns, Max Operating Temperature=125°C, Min Operating Temperature=-55°C, Package Description="3-Pin Through Hole Device, Body 6.6 x 6.99 mm, Pitch 2.54 mm", Package Quantity=250, Power=500mW, Resistance=10k, Tolerance=10%, Voltage Rating=300V, Composition=Potentiometer, Datasheet URL=http://www.bourns.com/docs/Product-Datasheets/3362.pdf, Datasheet Version=May-16, Lead Pitch=2.54mm, Manufacturer URL=http://www.bourns.com/, Mounting Technology=TH, Package Reference=3326P, Packaging=Rail/Tube, Pins=3, RoHS Compliant=True
Y1: library part CMP-27762-001978-1, "Crystal 16MHz ±20ppm 10pF SMD-4 2.5mm x 2mm", Case/Package=CSMD, ESR (Equivalent Series Resistance)=150R, Frequency=16MHz, Frequency Stability=20ppm, Load Capacitance=10pF, Max Operating Temperature=70°C, Min Operating Temperature=-20°C, Operating Frequency="16 MHz", Package Quantity=1000, Depth=2mm, Frequency Tolerance=20ppm, Height=0.02inch, Lead Free="Lead Free", Length=2.5mm, Mount="Surface Mount", Number of Pins=4, Packaging="Tape and Reel", REACH SVHC="No SVHC", Series=ABM10, Series Resistance=150R, Termination=SMD/SMT, Tolerance=20ppm, Width=0.079inch

## Via types
v1: diameter 50, hole 28, Top Layer to Bottom Layer, 34 vias
v2: diameter 157.48, hole 122.05, Top Layer to Bottom Layer, 1 vias

## Nets (pads, with @x,y where several pads share a name; then routed paths per layer and width w, separated by ;. In a path a pad name is that pad's centre, name@x,y a point inside that pad or via, vN(x,y) a via of type N, cw(c..) or ccw(c..) an arc to the next point about the centre after c; other vN are vias at no path point)
+3.3: C7.2 C12.2 MD1.1 U3.5 | length 3444.8
  Top Layer w10: U3.5 3800,4542.4 ; v1(3909,4278) 3850,4337 3850,4492.4 3800,4542.4 ; C7.2 4170,4577 3900,4577 3880,4557 C12.2 3851.37,4527.72 3836.69,4542.4 3800,4542.4
  Bottom Layer w10: MD1.1 1813.81,3802 1740,3802 1728,3814 1728,4040 1883,4195 3826,4195 v1(3909,4278)
+5: C1.1 C2.1 C6.2 C10.2 C11.2 D1.1 D2.1 D4.3 J3.A9 J3.B9 K1.5 P1.2 P2.2 P3.2 P4.2 R9.2 R10.2 U1.4 U1.6 U1.18 U2.3 U3.1 VR1.1 | length 15620.3
  Top Layer w10: J3.A9 1290,4014.96 1280,4024.96 1280,4124.65 1290,4134.65 J3.B9 1443,4134.65 ; D1.1 2177.74,4130.91 2174,4134.65 1443,4134.65 ; C6.2 3380,4552.72 ; C2.1 3651.57,3673.23 3750,3673.23 ; U1.4 3750,3736.22 ; v1(3807,4284.17) 3927.17,4164 R10.2 ; U1.18 4058.27,3641.73 4000,3700 3885,3700 3858.23,3673.23 U1.6 3750,3673.23 ; C1.1 4350.39,3591 4370,3591 4385,3606 4385,3809.26 4372.7,3821.56 4372.7,4523.84 4440,4591.14 4500,4591.14 ; R9.2 4616.14,2263 4803,2263 4860.63,2320.63 VR1.1 ; K1.5 5013.39,4591.14 D2.1 4500,4591.14 ; P3.2 5206,2866.44 5206,3240.65 P2.2 ; 1443,4134.65 1540,4231.65 1540,4495 1595,4550 1810,4550 2043,4783 2707,4783 U2.3 2910.72,4635 2993,4552.72 C10.2 3380,4552.72 ; 3380,4552.72 3390,4542.72 C11.2 3627,4542.72 3627.31,4542.4 U3.1 ; U3.1 3693.6,4542.4 3706,4530 3706,3760 3729.78,3736.22 3750,3736.22 ; U3.1 3670.87,4652 3659.84,4663.02 D4.3 3726.34,4840.12 4251.02,4840.12 4500,4591.14 ; 3750,3673.23 3735,3688.23 3735,3721.22 3750,3736.22
  Bottom Layer w10: P1.2 2980.71,2324.41 P4.2 4162.8,2658.86 VR1.1 4910.77,2709 5109,2709 P3.2 ; D4.3 3707.22,4821 3786,4821 3807,4800 v1(3807,4284.17) ; K1.5 5170,4634.13 5170,3373.31 P2.2
+24: D3.2 J2.1 | length 332.7
  Top Layer w10: J2.1 1559,4628.9 1573.25,4614.65 D3.2
GND: C1.2 C2.2 C3.2 C4.2 C5.2 C6.1 C7.1 C8.2 C9.1 C10.1 C11.1 C12.1 C13.1 D4.2 J2.2 J3.1 J3.2 J3.3 J3.4 J3.A12 J3.B12 MD1.10 P1.6 P2.6 P3.6 P4.1 Q1.2 R7.2 R8.2 R13.1 R14.1 SW1.4 U1.3 U1.5 U1.21 U2.2 U3.2 U3.3 VR1.3 Y1.2 Y1.4 | length 17683.6
  Top Layer w10: J3.2 J3.A12 ; J2.2 1361,4448.91 1361,4244.88 J3.1 J3.B12 1280,4183.07 1260,4163.07 1260,3986.54 1280,3966.54 J3.A12 ; C8.2 2255.71,4557.72 C9.1 2832.28,4557.72 U2.2 2973,4535 2990.72,4517.28 C10.1 3360,4517.28 3380,4497.28 ; P1.6 2684,2276.63 2684,2200 2660,2176 2520,2176 1850.39,2845.61 MD1.10 1579,3401.32 1579,3617 1590,3628 1614.17,3628 R13.1 1614.17,3797.63 1574.8,3837 R7.2 R8.2 1437.01,3980 1423.54,3966.54 J3.A12 ; R14.1 3016.97,3248.03 3285,2980 3926,2980 3984,3038 3984,3153 3894,3243 3894,3302.93 3880,3316.93 ; C6.1 3380,4497.28 ; C4.2 3538,3474.41 3539.14,3475.55 Y1.4 ; P4.1 3678.5,3122.21 Y1.2 3670.21,3426.34 3621,3475.55 Y1.4 ; D4.2 3806.34,4820.12 4089.88,4820.12 4226,4684 4226,4569 4180,4523 C7.1 ; U1.5 3838.98,3704.72 3870.47,3736.22 3896.93,3736.22 ; U1.3 3865.44,3767.72 3896.93,3736.22 ; C5.2 3880,3316.93 ; C12.1 4009,4492.28 4040.93,4460.35 C7.1 ; Q1.2 4666.67,4234.25 4652.41,4220 4652.41,3696.9 4704.72,3644.59 4704.72,3129.28 ; VR1.3 5020.49,2699 4728.72,2699 4704.72,2723 SW1.4 4704.72,3129.28 ; P3.6 5284,2684 5284,3059.31 P2.6 ; 3380,4497.28 3390,4507.28 C11.1 3626,4507.28 3628.28,4505 U3.2 U3.3 3638,4467.6 3607,4436.6 3607,3938.52 3592.52,3924.04 C2.2 3592.52,3570 3613.54,3548.98 Y1.4 ; 3880,3316.93 4000.83,3316.93 4038,3279.76 4242.28,3279.76 4327,3364.49 4327,3507 ; 3896.93,3736.22 U1.21 4245.91,3736.22 4257.4,3747.72 4257.4,4000.6 4143.83,4114.17 ; 4143.83,4114.17 4292,4114.17 4350.39,4055.78 C3.2 4350.39,3671.06 4291.34,3612 C1.2 4291.34,3542.66 4327,3507 ; 4143.83,4114.17 C13.1 4112.2,4160.2 4170,4218 C7.1 ; 4327,3507 4704.72,3129.28
  Bottom Layer w10: J3.4 J3.2 ; J3.3 J3.1 ; J2.2 2037.68,4491.1 C8.2 ; U2.2 3521.22,4535 D4.2 ; VR1.3 5083.27,2636.22 P3.6
NetC3_1: C3.1 U1.20 | length 169
  Top Layer w10: U1.20 4230.14,3704.72 4234.07,3700.79 C3.1
NetC4_1: C4.1 U1.8 Y1.1 | length 1430.4
  Top Layer w10: Y1.1 3543.98,3426.34 3533,3415.35 C4.1 3464,3415.35 3464,3079 3520,3023 3760,3023 3794,3057 3794,3194 3777,3211 3777,3610.24 U1.8
NetC5_1: C5.1 U1.7 Y1.3 | length 588.6
  Top Layer w10: v1(3728,3475.55) Y1.3 3678.5,3620.24 3700,3641.73 U1.7 ; C5.1 3878,3375.98 v1(3878,3451)
  Bottom Layer w10: v1(3728,3475.55) 3752.55,3451 v1(3878,3451)
NetC8_1: C8.1 C9.2 D3.1 U2.1 | length 1200.3
  Top Layer w10: D3.1 1950,4445.35 1958.78,4436.57 C8.1 2265.71,4522.28 C9.2 2518,4522.28 2605.28,4435 U2.1
NetC13_2: C13.2 P1.5 R10.1 U1.29 | length 3783.6
  Top Layer w10: v1(2530,3996) 2530,2330.63 P1.5 ; U1.29 3940.94,4041.22 3986.22,4086.5 R10.1 C13.2 4076.77,4130.23 4060,4147 v1(4040,4147)
  Bottom Layer w10: v1(2530,3996) 2681,4147 v1(4040,4147)
NetD1_2: D1.2 R1.1 | length 130.7
  Top Layer w10: D1.2 3110.24,4173.23 R1.1
NetD1_3: D1.3 R3.1 | length 181.5
  Top Layer w10: D1.3 3147.44,4097.44 3169,4119 3210,4119 3224.41,4104.59 R3.1
NetD1_4: D1.4 R6.1 | length 195
  Top Layer w10: D1.4 3044,4087.89 3044,4080 3108.25,4015.75 R6.1
NetD2_2: D2.2 K1.1 Q1.3 | length 648.9
  Top Layer w10: D2.2 4763.78,4444.29 4763.78,4291 ; Q1.3 4763.78,4291 ; K1.1 4868.45,4395.67 4763.78,4291
NetD4_1: D4.1 U1.32 | length 991.2
  Top Layer w10: U1.32 3846.46,3954.54 3726,4075 3726,4639.78 D4.1
NetJ1_1: J1.1 K1.4 | length 947.4
  Top Layer w10: K1.4 5416,4683.41 5416,3892.38 J1.1
NetJ1_2: J1.2 K1.3 | length 1569.1
  Top Layer w10: K1.3 5302,4543.31 5302,4800 5351,4849 5387,4849 5436,4800 5436,3774.58 J1.2
NetJ1_3: J1.3 K1.2 | length 827.1
  Top Layer w10: K1.2 5308,4295.2 5308,3617.2 J1.3
NetJ3_A5: J3.A5 R7.1 | length 282.4
  Top Layer w10: J3.A5 1503.02,4094.49 1567,4030.51 R7.1
NetJ3_B5: J3.B5 R8.1 | length 128.3
  Top Layer w10: J3.B5 1365,4055.12 1389.61,4030.51 R8.1
NetMD1_2: MD1.2 U1.30 | length 2344.9
  Top Layer w10: v1(3887,4038) 3909.45,4015.55 U1.30
  Bottom Layer w10: MD1.2 2489.84,3759.84 2808.55,4078.55 3846.45,4078.55 v1(3887,4038)
NetMD1_3: MD1.3 R11.1 R13.2 | length 900
  Top Layer w10: R11.1 1632.21,3512.13 1614.17,3530.16 R13.2 1640,3596.46 1653,3609.46 1653,3848 1720,3915 1860,3915 1893,3882 1893,3723.71 MD1.3
NetMD1_13: MD1.13 R12.1 R14.2 | length 333.7
  Top Layer w10: MD1.13 2755.91,3248.03 R14.2 2893.7,3181.91 2899.61,3176 R12.1
NetP1_1: P1.1 U1.16 | length 2283.2
  Top Layer w10: U1.16 4066.93,3436.07 v1(4074,3429)
  Bottom Layer w10: P1.1 2788.63,2272 2721.48,2272 2688.74,2304.74 2688.74,2344.08 3340.66,2996 3360,2996 3547,3183 4001,3183 4042,3224 4042,3397 v1(4074,3429)
NetP1_3: P1.3 U1.17 | length 2909.6
  Top Layer w10: U1.17 4124.02,3459.98 v1(4134,3450)
  Bottom Layer w10: P1.3 2683.7,2276.93 2611.81,2276.93 2588.74,2300 2588.74,2805.74 3362,3579 3901,3579 3988,3666 4036.84,3666 4094,3608.84 4094,3490 v1(4134,3450)
NetP1_4: P1.4 U1.15 | length 2316.3
  Top Layer w10: U1.15 4035.43,3500.49 4034,3499.05 4034,3400 4074.24,3359.76 v1(4158,3359.76)
  Bottom Layer w10: P1.4 3539.81,3128 3866,3128 3894,3100 3894,3060 3915.85,3038.15 3961.65,3038.15 4118,3194.5 4118,3319.76 v1(4158,3359.76)
NetP2_1: P2.1 U1.24 | length 1702.8
  Top Layer w10: U1.24 v1(4124,3871)
  Bottom Layer w10: v1(4124,3871) 4324.44,3871 4355,3901.56 4432.47,3901.56 5193.03,3141 5280,3141 5302,3163 5302,3236.65 P2.1
NetP2_3: P2.3 U1.25 | length 2015.6
  Top Layer w10: U1.25 4066.93,3941.9 v1(4086.93,3961.9)
  Bottom Layer w10: v1(4086.93,3961.9) 4077,3951.97 4077,3846.21 4168.36,3754.85 4493.15,3754.85 5207,3041 5380,3041 5402,3063 5402,3141.31 P2.3
NetP2_4: P2.4 U1.1 | length 2129.9
  Top Layer w10: v1(3781,3960) 3781,3830.71 U1.1
  Bottom Layer w10: v1(3781,3960) 3907,3960 3947,4000 3947,4056.06 3955.94,4065 4021,4065 4081,4005 4086.76,4005 4120,4038.24 4466.82,4038.24 4740.58,3764.48 4740.58,3712.42 5227,3226 5254.33,3226 P2.4
NetP2_5: P2.5 U1.26 | length 2273.2
  Top Layer w10: U1.26 4035.43,3932.43 4044,3941 4044,4020 v1(4084,4060) ; v1(5013,4060) 5013,3733 5402,3344 5402,3136.65 P2.5
  Bottom Layer w10: v1(4084,4060) v1(5013,4060)
NetP3_1: P3.1 U1.12 | length 2159.1
  Top Layer w10: U1.12 3940.94,3510 4001.43,3449.51 4001.43,3391.2 4072.87,3319.76 4177.76,3319.76 4198,3340 4198,3498.85 4253,3553.85 v1(4253,3639)
  Bottom Layer w10: v1(4253,3639) 4533.44,3639 P3.1
NetP3_3: P3.3 U1.11 | length 2066.8
  Top Layer w10: U1.11 3909.45,3500 3981.43,3428.02 3981.43,3372.57 4054.24,3299.76 4218,3299.76 4287,3368.76 v1(4287,3467)
  Bottom Layer w10: v1(4287,3467) 4870,2884 5260,2884 5284,2860 5284,2788.44 P3.3
NetP3_5: P3.5 U1.22 | length 2511.7
  Top Layer w10: U1.22 4225.12,3767.72 4237.4,3780 4237.4,3938.6 v1(4178,3998) ; v1(4693,3737) 4899,3737 5306,3330 5306,3069 5384,2991 5384,2684 P3.5
  Bottom Layer w10: v1(4178,3998) 4238,3938 4459.46,3938 4660.46,3737 v1(4693,3737)
NetP4_3: P4.3 U1.28 | length 1618.1
  Top Layer w10: U1.28 3972.44,3932.56 3964,3941 3964,3988 v1(4001,4025)
  Bottom Layer w10: P4.3 3903.5,3018.15 4096.15,3018.15 4158,3080 4158,3279.76 4198,3319.76 4198,3481 4134,3545 4134,3663.18 4067.18,3730 4044,3730 4003,3771 4003,3858 4044,3899 4044,3982 v1(4001,4025)
NetP4_4: P4.4 U1.27 | length 1194.8
  Top Layer w10: U1.27 4003.94,3964.94 v1(4004,3965)
  Bottom Layer w10: P4.4 4093,3236.7 4093,3388.63 4114.37,3410 4164,3410 4174,3420 4174,3476 4114,3536 4114,3640 4044,3710 4011,3710 3981,3740 3981,3942 v1(4004,3965)
NetQ1_1: Q1.1 R5.2 | length 138.6
  Top Layer w10: R5.2 4615,4311.02 4616.97,4309.06 Q1.1
NetR1_2: R1.2 R2.1 | length 250
  Top Layer w10: R1.2 R2.1
NetR2_2: R2.2 U1.9 | length 2297.9
  Top Layer w10: R2.2 3521.65,4172 3587,4120 3587,3980 3422,3815 3422,3040 3462,3000 3844,3000 3884,3040 3884,3196 3797,3283 3797,3480.54 3846.46,3530 U1.9
NetR3_2: R3.2 R4.1 | length 333.7
  Top Layer w10: R3.2 3192.91,4080 3216.91,4056 3294,4056 3332.49,4094.49 R4.1
NetR4_2: R4.2 U1.10 | length 688.9
  Top Layer w10: R4.2 3521.65,4024.35 v1(3547,3999) ; v1(3865,3633) 3877.95,3620.05 U1.10
  Bottom Layer w10: v1(3547,3999) 3547,3951 v1(3865,3633)
NetR5_1: R5.1 U1.23 | length 788.4
  Top Layer w10: U1.23 4188.21,3799.21 v1(4197,3808) ; v1(4413,3861) 4470.47,3918.47 R5.1
  Bottom Layer w10: v1(4197,3808) 4360,3808 v1(4413,3861)
NetR6_2: R6.2 U1.13 | length 1033.7
  Top Layer w10: R6.2 v1(3301.75,4015.75) ; v1(3925,3660) 3972.44,3612.56 U1.13
  Bottom Layer w10: v1(3301.75,4015.75) 3485.75,4015.75 3528.55,4058.55 3570.45,4058.55 3925,3704 v1(3925,3660)
NetR9_1: R9.1 SW1.1 U1.2 | length 2023.5
  Top Layer w10: U1.2 3873.94,3799.21 3899.15,3774 4018.79,3774 v1(4044,3799.21) ; v1(4473,3030) 4473,2586 4527.56,2531.44 SW1.1 4527.56,2377.53 4557.09,2348 R9.1
  Bottom Layer w10: v1(4044,3799.21) 4154,3689.21 4154,3559 4218,3495 4218,3285 v1(4473,3030)
NetR11_2: R11.2 U1.31 | length 3461.6
  Top Layer w10: R11.2 1640,3435.04 1768,3563.04 v1(1768,3843) ; U1.31 3877.95,3843.05 3907,3814 v1(3939,3814)
  Bottom Layer w10: v1(1768,3843) 1807,3882 2487,3882 2704,4099 3924,4099 3927,4096 3927,4018 3900,3991 3859,3991 3834,4016 3777,4016 3741,3980 3741,3940 3867,3814 v1(3939,3814)
NetR12_2: R12.2 U1.14 | length 1927.3
  Top Layer w10: R12.2 2958.66,2998.34 3000,2957 3955,2957 4009,3011 4009,3212 v1(3969,3252) ; U1.14 4003.94,3617.94 v1(4012,3626)
  Bottom Layer w10: v1(3969,3252) 4012,3295 v1(4012,3626)
NetU1_19: U1.19 VR1.2 | length 1355.5
  Top Layer w10: U1.19 4200,3673.23 4213,3660.23 v1(4213,3576)
  Bottom Layer w10: v1(4213,3576) 4238,3551 4238,3396 4875.14,2758.86 VR1.2
pads on no net: MD1.4 MD1.5 MD1.6 MD1.7 MD1.8 MD1.9 MD1.11 MD1.12 MD1.14 MD1.15 MD1.16 MD1.17 MD1.18 MD1.19 MD1.20 P3.4 P4.0 SW1.2 SW1.3 U3.4
copper on no net:
  other v2: 8838.58,1338.58

## Polygon pours and split planes (outlines as drawn)
no net on Top Layer "NONET_L01_P000" (solid, pour order 0): 1003.94,5019.69 1023.62,5000 5610.24,5000 5610.24,2047.24 984.25,2047.24 984.25,4980.31

## Text inside footprints (layer, text, board x,y; h text height)
C8: Top Overlay "+" at 2210,4275 h59.06 r90
P4: Top Overlay "GND" at 3655.51,2917.32 h39.37 r90; Top Overlay "GLCD_SSD1306" at 3442.91,2570.87 h60; Top Overlay "VCC" at 3755.51,2917.32 h39.37 r90; Top Overlay "SCL" at 3855.51,2917.32 h39.37 r90; Top Overlay "SDA" at 3955.51,2917.32 h39.37 r90